# Altium PCB sitara_rev2.PcbDoc
Units mm, origin at the board's own origin, x right, y up, seen from the top; angles counter-clockwise.
Board outline 41.91 x 60.96 mm, 4 copper layers (Top Layer, Internal Plane 1, Internal Plane 2, Bottom Layer), stack 1.61 mm thick; 108 components, 76 nets, 383 pads, 336 vias.
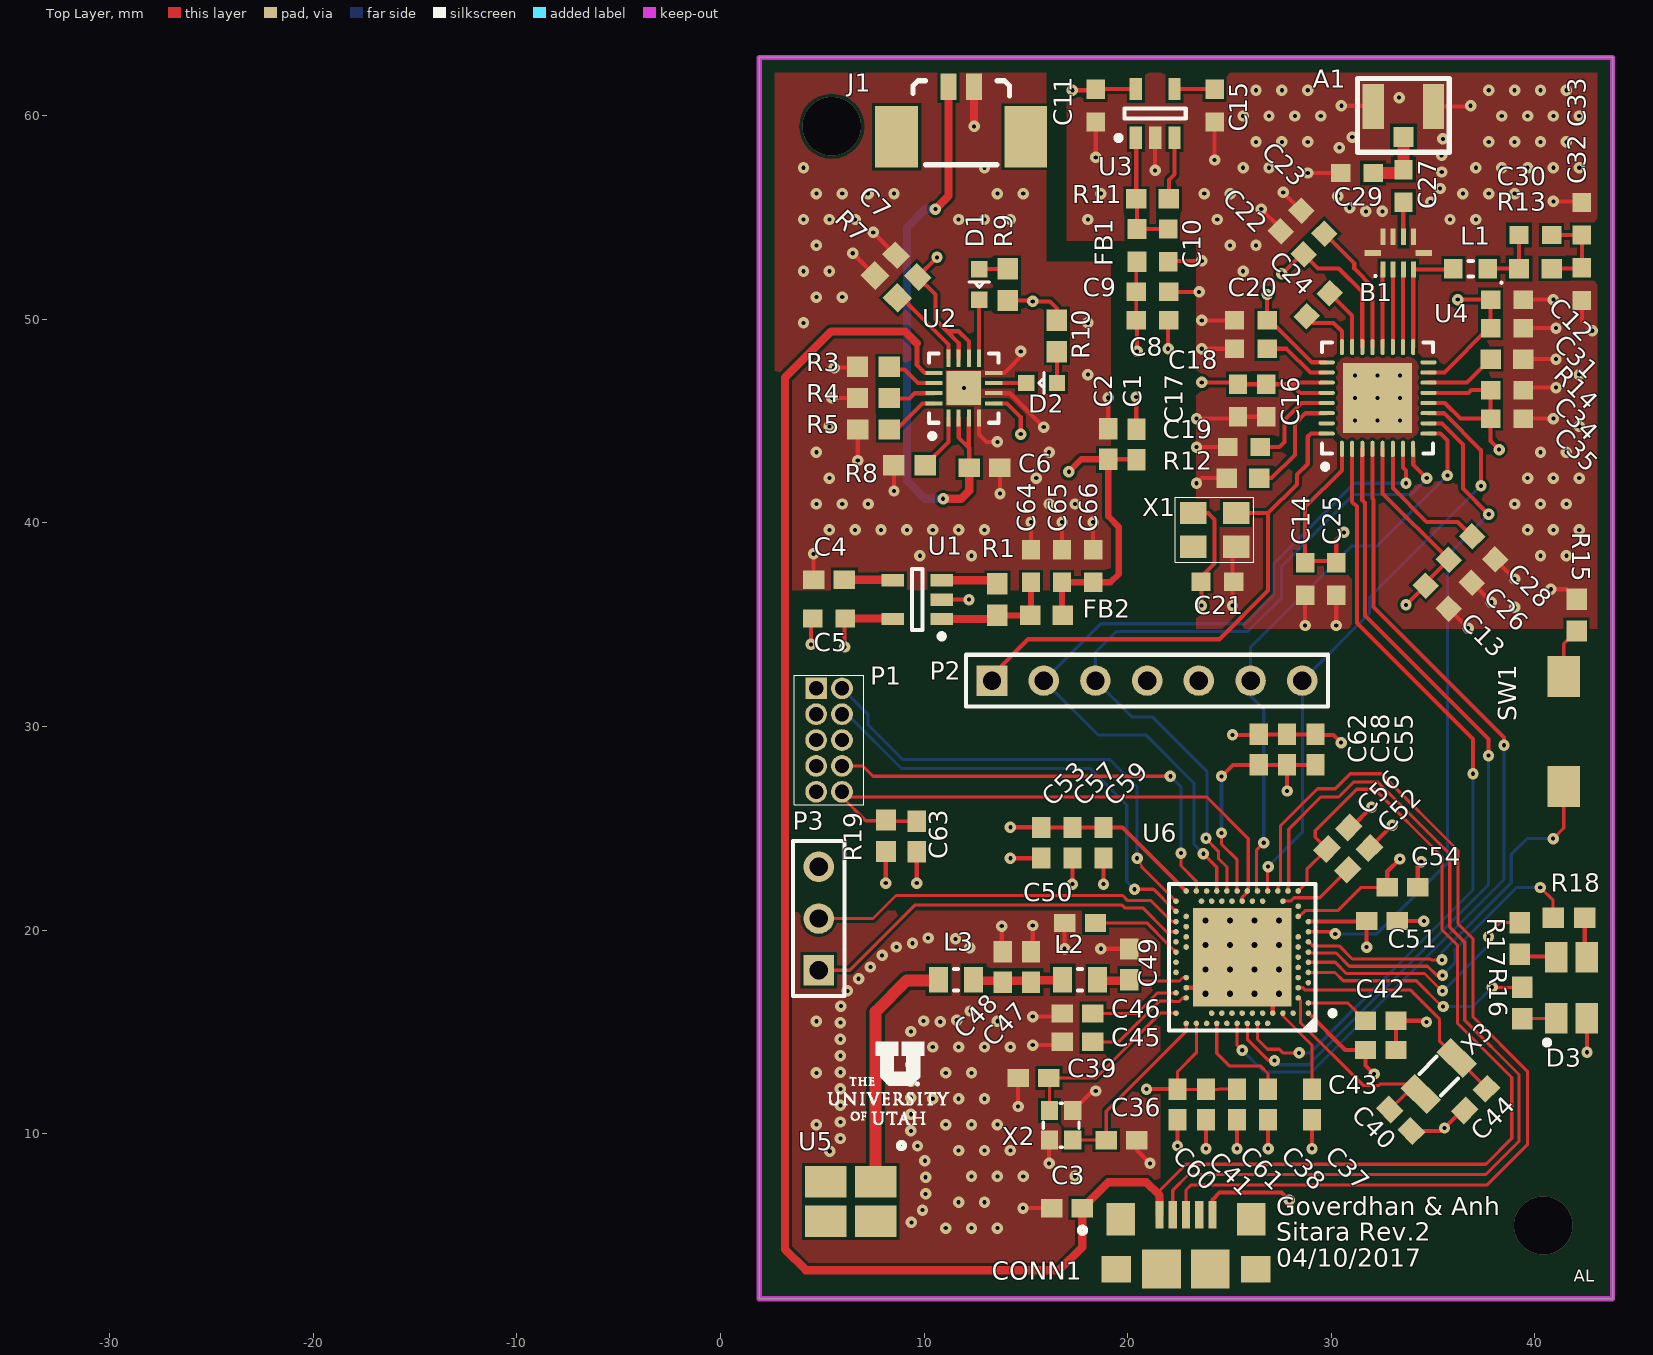
[diagram p0: Top Layer view]
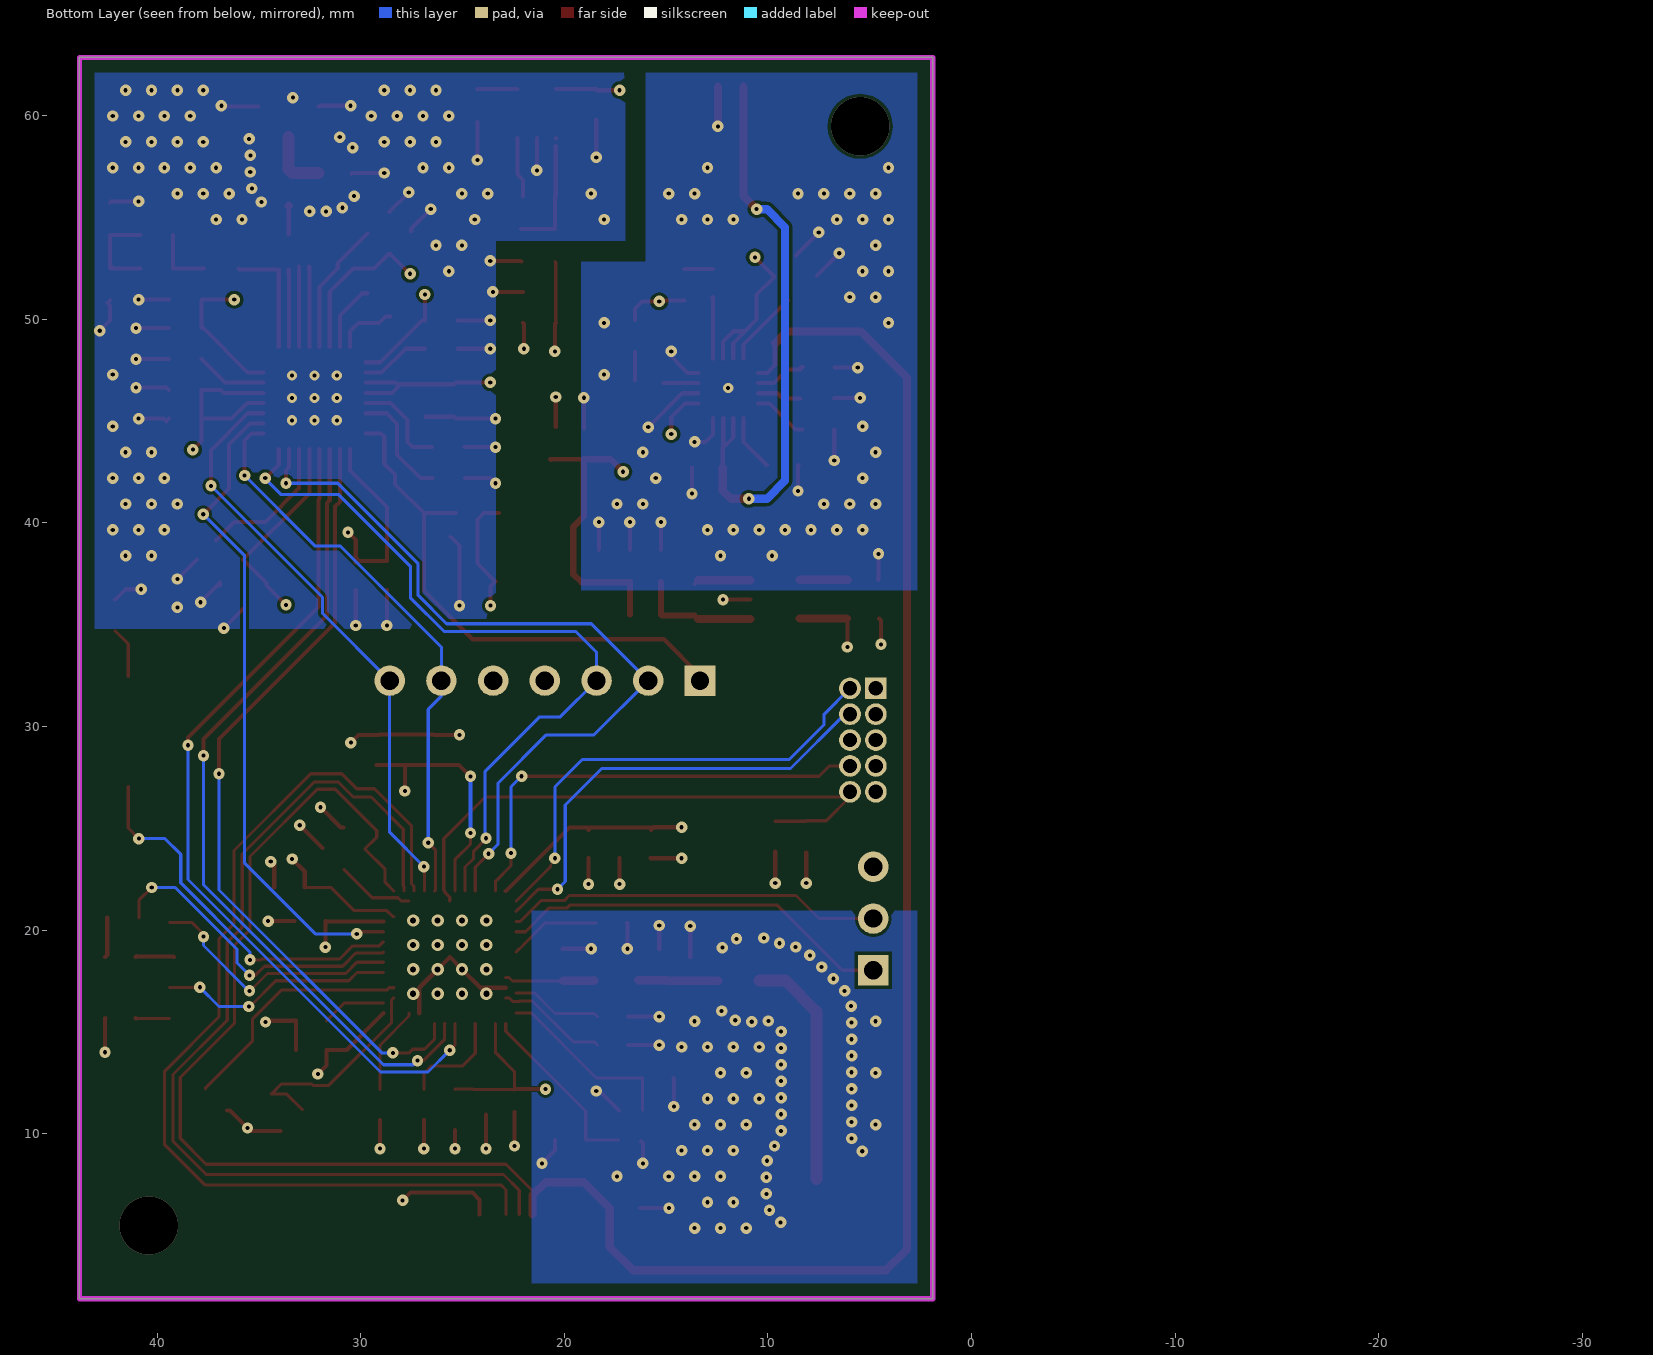
[diagram p1: Bottom Layer view, seen from below]
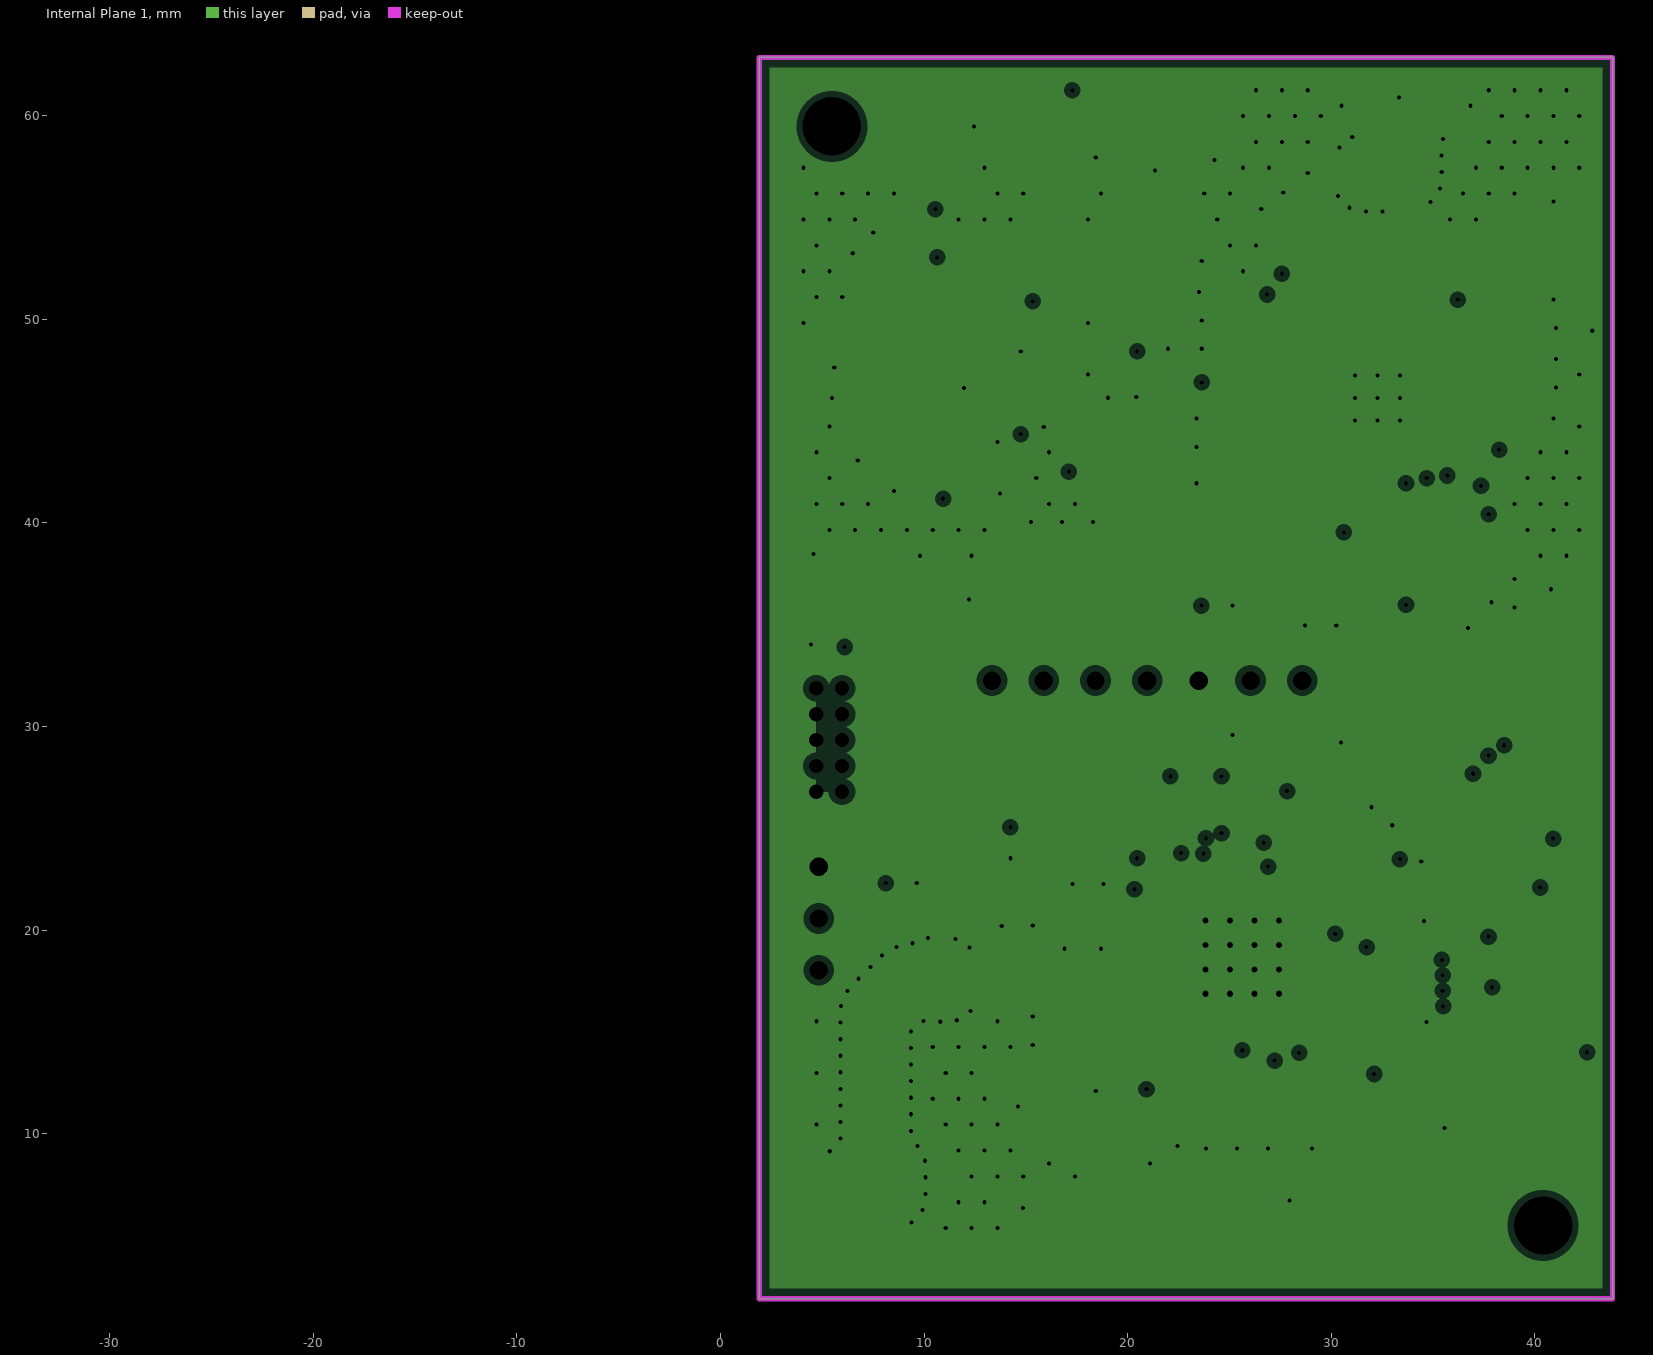
[diagram p2: Internal Plane 1, clearances drawn from the general rule]
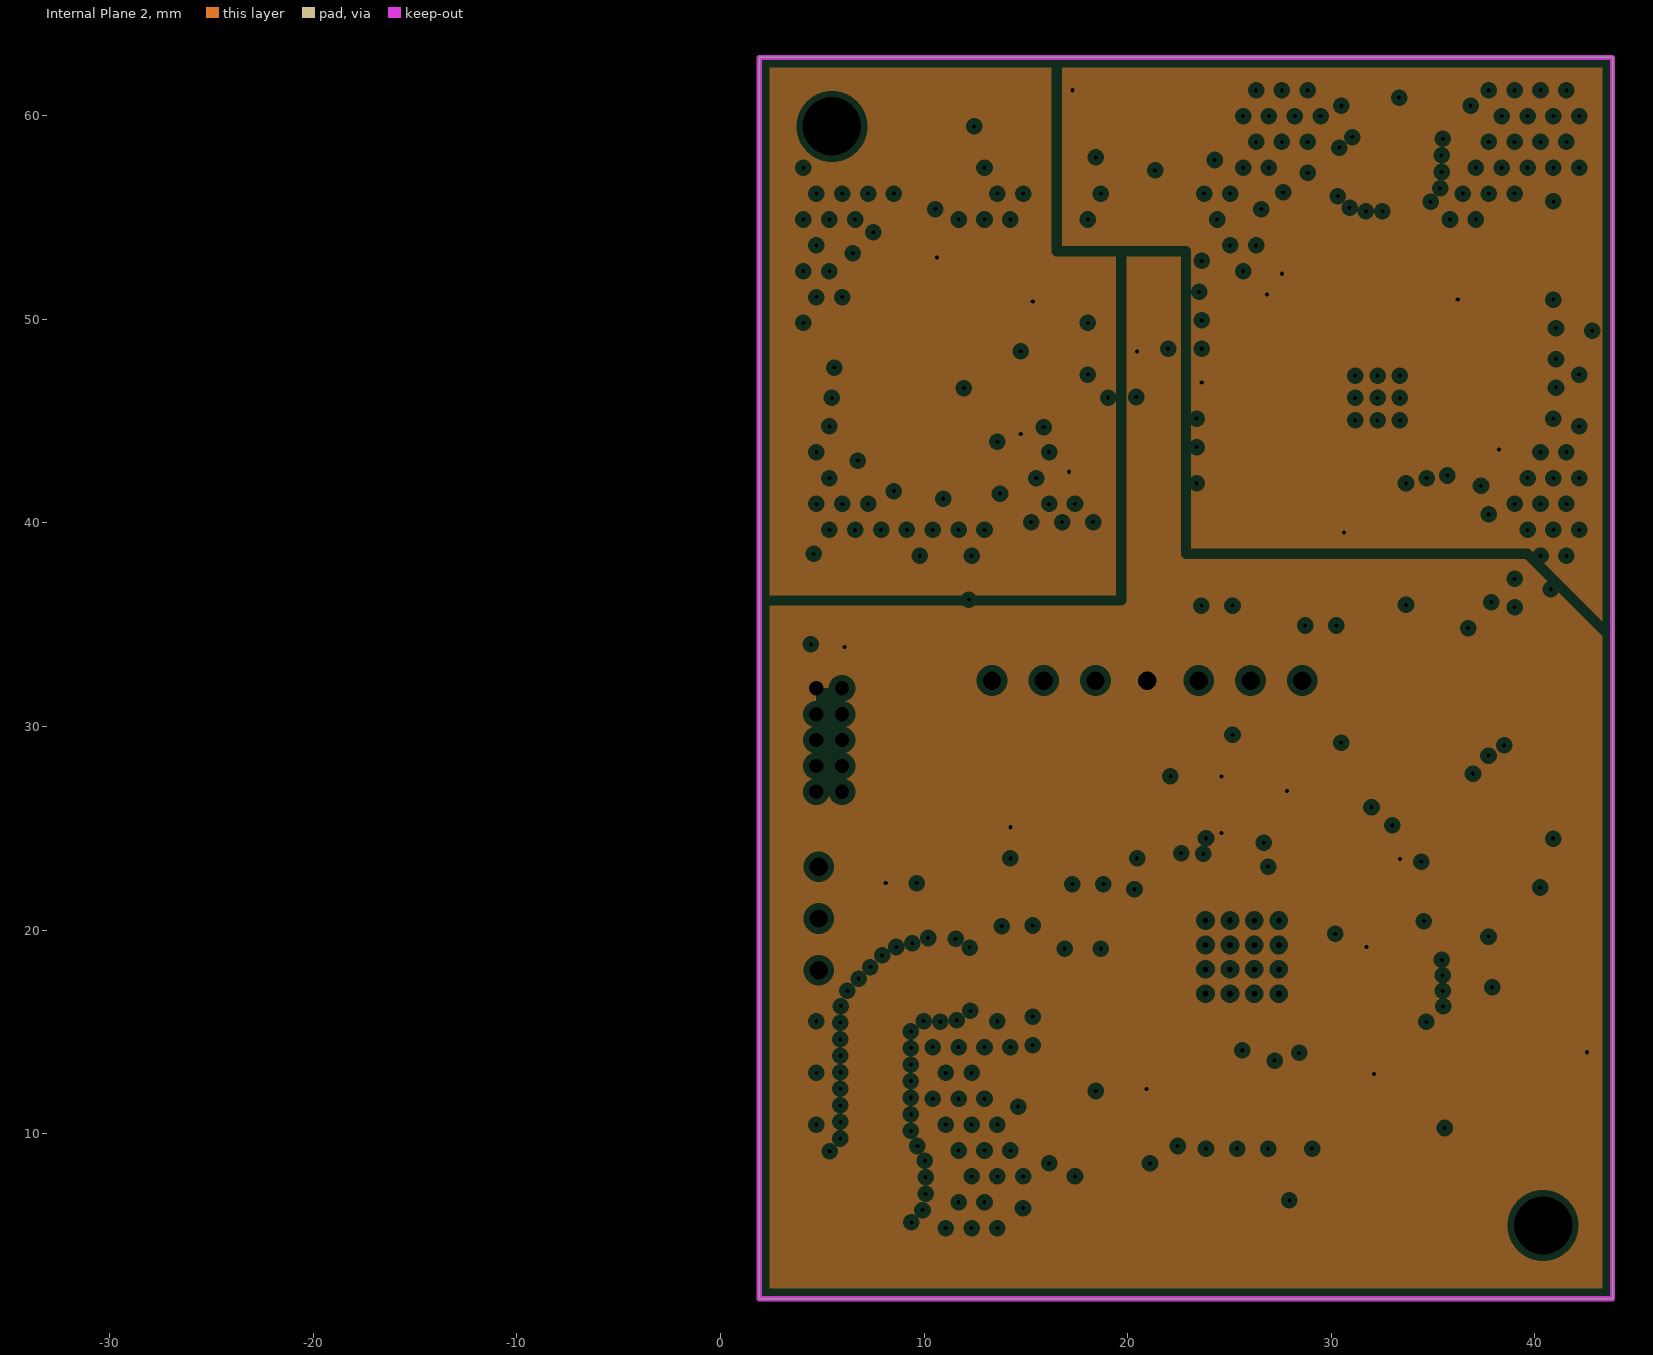
[diagram p3: Internal Plane 2, clearances drawn from the general rule]

## Layer stack, top to bottom
Top Solder: solder mask 0.001, Solder Resist, Dk 3.5
Top Layer: signal copper 0.035
Dielectric1: prepreg 0.38, ML 4, Dk 4.2
Internal Plane 1: plane copper 0.035, net GND
Dielectric2: prepreg 0.71, ML 4, Dk 4.2
Internal Plane 2: plane copper 0.035, net VDD
Dielectric3: prepreg 0.38, ML 4, Dk 4.2
Bottom Layer: signal copper 0.035
Bottom Solder: solder mask 0.001, Solder Resist, Dk 3.5

## Board outline
1.905,1.905 1.905,62.865 43.815,62.865 43.815,1.905

## Design rules (kind name [scope] priority, off if disabled: settings)
Clearance "Clearance~Sunstone Circuits" [All] p1: gap=0.152 ignorepadtopadclearanceinfootprint=FALSE except(0: Arc-Hole Track-Hole SMDPad-Hole THPad-Hole Via-Hole Fill-Hole Poly-Hole Region-Hole Text-Hole) // Sunstone Circuits Minimum Clearance Rule (MLB~4&6 Layer Designs)
Clearance Shielding [InPolygon vs InNetClass('RF')] p2: gap=1.016 ignorepadtopadclearanceinfootprint=FALSE except(0: Arc-Hole Track-Hole SMDPad-Hole THPad-Hole Via-Hole Fill-Hole Poly-Hole Region-Hole Text-Hole)
Clearance [All] p3: gap=0.203 ignorepadtopadclearanceinfootprint=FALSE except(0: Arc-Hole Track-Hole SMDPad-Hole THPad-Hole Via-Hole Fill-Hole Poly-Hole Region-Hole Text-Hole; 0.152: Arc-SMDPad Track-SMDPad SMDPad-SMDPad)
DiffPairsRouting [All] p1: maxlimit=0.254 minlimit=0.254 mostfreqgap=0.254 toplayer_minwidth=0.381 toplayer_maxwidth=0.381 toplayer_prefwidth=0.381 bottomlayer_minwidth=0.381 bottomlayer_maxwidth=0.381 bottomlayer_prefwidth=0.381 maxuncoupledlength=12.7
HoleSize "HoleSize~Sunstone Circuits" [All] p1: absolutevalues=TRUE maxlimit=6.375 minlimit=0.203 maxpercent=80.000 minpercent=20.000 // Sunstone Circuits Hole Size Rule (MLB~4&6 Layer Designs)
HoleSize Testpoint [All] p2: absolutevalues=TRUE maxlimit=2.54 minlimit=0.025 maxpercent=80.000 minpercent=20.000
HoleSize TestPointUsage [All] p3: absolutevalues=TRUE maxlimit=2.54 minlimit=0.025 maxpercent=80.000 minpercent=20.000
HoleSize [All] p4: absolutevalues=TRUE maxlimit=2.54 minlimit=0.025 maxpercent=80.000 minpercent=20.000
MinimumAnnularRing "MinimumAnnularRing~Sunstone Circuits" [All] p1: minimumring=0.178 // Sunstone Circuits Minimum Annular Ring (MLB~4&6 Layer Designs)
PlaneClearance "PlaneClearance~Sunstone Circuits" [All] p1: clearance=0.305 // Sunstone Circuits Power Plane Clearance Rule (MLB~4&6 Layer Designs)
PlaneClearance [All] p2: clearance=0.508
PlaneConnect [All] p1: planeconnectstyle=Direct reliefexpansion=0.508 reliefentries=4 reliefconductorwidth=0.254 reliefairgap=0.254
PlaneConnect "PlaneConnect~Sunstone Circuits" [All] p2: planeconnectstyle=Relief reliefexpansion=0.254 reliefentries=4 reliefconductorwidth=0.203 reliefairgap=0.254 // Sunstone Circuits Power Plane Connect Rule (MLB~4&6 Layer Designs)
PolygonConnect Stitch [IsPolygon vs InNet('GND')] p1: connectstyle=Direct reliefconductorwidth=0.254 reliefentries=4 polygonreliefangle="90 Angle" airgapwidth=0.254
PolygonConnect "PolygonConnect~Sunstone Circuits" [All] p2: connectstyle=Relief reliefconductorwidth=0.203 reliefentries=4 polygonreliefangle="90 Angle" airgapwidth=0.254 // Sunstone Circuits Polygon Connect Style (MLB~4&6 Layer Designs)
PolygonConnect [All] p3: connectstyle=Relief reliefconductorwidth=0.254 reliefentries=4 polygonreliefangle="90 Angle" airgapwidth=0.254
RoutingVias "RoutingVias~Sunstone Circuits" [All] p1: holewidth=0.406 width=0.762 viastyle="Through Hole" minholewidth=0.203 minwidth=0.61 maxholewidth=0.508 maxwidth=1.016 // Sunstone Circuits Routing Vias Rule (MLB~4&6 Layer Designs)
RoutingVias [All] p2: holewidth=0.305 width=0.61 viastyle="Through Hole" minholewidth=0.15 minwidth=0.35 maxholewidth=0.305 maxwidth=0.61
ShortCircuit "ShortCircuit~Sunstone Circuits" [All] p1: allowed=FALSE // Sunstone Circuits Short Circuit Rule~Do Not Allow (MLB~4&6 Layer Designs)
ShortCircuit [All] p2: allowed=FALSE
SolderMaskExpansion "SolderMaskExpansion~Sunstone Circuits" [All] p1: expansion=0.076 // Sunstone Circuits Solder Mask Expansion Rule (MLB~4&6 Layer Designs)
SolderMaskExpansion [All] p2: expansion=0.102
ViasUnderSMD "ViasUnderSMD~Sunstone Circuits" [All] p1: allowed=FALSE // Sunstone Circuits Vias Under SMD~Do Not Allow (MLB~4&6 Layer Designs)
Width Antenna [InNetClass('RF')] p1: maxlimit=0.58 minlimit=0.58 preferedwidth=0.58 impedancedriven=TRUE minimp=50.000000 maximp=50.000000 favimp=50.000000
Width "Width~Sunstone Circuits" [All] p2: maxlimit=2.54 minlimit=0.152 preferedwidth=0.254 // Sunstone Circuits Minimum Width Rule (MLB~4&6 Layer Designs)
Width [All] p3: maxlimit=1.016 minlimit=0.102 preferedwidth=0.406 bottomlayer_minwidth=0.152 minimp=50.000000 maximp=50.000000 favimp=50.000000
25 further rules are at their usual default settings.

## Classes and differential pairs
component class _Block_level_sheet: U5
component class U_BLE_USB_nRF52840: C36 C37 C38 C39 C40 C41 C42 C43 C44 C45 C46 C47 C48 C49 C50 C51 C52 C53 C54 C55 C56 C57 C58 C59 C60 C61 C62 C63 D3 L2 L3 P1 P3 R15 R16 R17 R18 R19 SW1 U6 X2 X3
component class U_Power_System: C1 C2 C3 C4 C5 C6 C7 C64 C65 C66 CONN1 D1 D2 FB2 J1 R1 R3 R4 R5 R7 R8 R9 R10 U1 U2
component class U_RF: A1 B1 C8 C9 C10 C11 C12 C13 C14 C15 C16 C17 C18 C19 C20 C21 C22 C23 C24 C25 C26 C27 C28 C29 C30 C31 C32 C33 C34 C35 FB1 L1 P2 R11 R12 R13 R14 U3 U4 X1
net class RF: ANT NetA1_1
differential pair D1: +D1_P -D1_N

## Components (designator, comment, footprint, x,y, rotation, side; value= is the part's Value field where it differs from the comment)
A1 "U.FL-R-SMT(01)" U.FL-R-SMT-1 33.542,60.452 r0 top
B1 "0900PC15J0013" 0900PC15J0013 33.287,53.251 r90 top
C1 "4.7uF" 0603_Cap 20.432,43.859 r270 top
C2 "0.1uF" 0603_Cap 19.041,43.875 r270 top
C3 "1uF" 0603_Cap 17.018,6.35 r0 top
C4 "10uF" 0603_Cap 5.334,37.211 r0 top
C5 "GRM188R61A105KA61D" "CAPC1608X08N (0603)" 5.334,35.306 r0 top
C6 "4.7uF" 0603_Cap 12.967,42.71 r180 top
C7 "4.7uF" 0603_Cap 9.157,52.616 r315 top
C8 "GRM188R60J106ME47D" "CAPC1608X08N (0603)" 21.222,49.949 r180 top
C9 "GRM188R61A105KA61D" "CAPC1608X08N (0603)" 21.222,51.346 r180 top
C10 "GRM188F51A225ZE01D" "CAPC1608X08N (0603)" 21.984,53.632 r90 top
C11 "GRM188R61A105KA61D" "CAPC1608X08N (0603)" 18.428,60.49 r90 top
C12 "GRM033R60J104KE19D" "CAPC1608X08N (0603)" 38.621,50.965 r180 top
C13 "GRM033R60J104KE19D" "CAPC1608X08N (0603)" 35.192,36.36 r135 top
C14 "GRM188R60J106ME47D" "CAPC1608X08N (0603)" 28.715,37.249 r90 top
C15 "GRM1885C1H102JA01D" "CAPC1608X08N (0603)" 24.27,60.49 r90 top
C16 "GCM188R71H473KA55D" "CAPC1608X08N (0603)" 26.81,46.012 r270 top
C17 "GCM188R71H473KA55D" "CAPC1608X08N (0603)" 25.413,46.012 r270 top
C18 "GCM188R71H473KA55D" "CAPC1608X08N (0603)" 26.048,48.552 r0 top
C19 "GCM188R71H473KA55D" "CAPC1608X08N (0603)" 25.705,43.726 r180 top
C20 "GCM188R71H473KA55D" "CAPC1608X08N (0603)" 26.048,49.949 r0 top
C21 "GRM188R71H103MA01D" "CAPC1608X08N (0603)" 24.402,37.117 r180 top
C22 "GCM188R71H473KA55D" "CAPC1608X08N (0603)" 28.08,53.759 r315 top
C23 "GRM188R71H103MA01D" "CAPC1608X08N (0603)" 29.096,54.775 r135 top
C24 "GRM1885C1H152JA01D" "CAPC1608X08N (0603)" 29.35,50.711 r225 top
C25 "GCM188R71H473KA55D" "CAPC1608X08N (0603)" 30.239,37.249 r90 top
C26 "GCM188R71H473KA55D" "CAPC1608X08N (0603)" 36.335,37.63 r135 top
C27 "C_TBD" "CAPC1608X08N (0603)" 33.541,56.553 r90 top
C28 "GRM188R71E224KA88D" "CAPC1608X08N (0603)" 37.478,38.773 r135 top
C29 "C_TBD" "CAPC1608X08N (0603)" 31.255,57.188 r0 top
C30 "GRM1885C1H330JA01D" "CAPC1608X08N (0603)" 40.018,54.14 r180 top
C31 "GCM188R71H473KA55D" "CAPC1608X08N (0603)" 38.621,49.568 r0 top
C32 "GRM188R71H103MA01D" "CAPC1608X08N (0603)" 42.304,51.727 r90 top
C33 "GQM1885C1H101JB01D" "CAPC1608X08N (0603)" 42.304,54.94 r270 top
C34 "GCM188R71H473KA55D" "CAPC1608X08N (0603)" 38.621,46.52 r0 top
C35 "GCM188R71H473KA55D" "CAPC1608X08N (0603)" 38.621,45.123 r0 top
C36 "12pF" 0603_Cap 19.698,9.69 r0 top
C37 "1uF" 0603_Cap 29.052,11.436 r90 top
C38 "DNP (0.1uF)" 0603_Cap 26.893,11.436 r270 top
C39 "12pF" 0603_Cap 15.38,12.738 r180 top
C40 "12pF" 0603_Cap 33.401,10.668 r135 top
C41 "0.1uF" 0603_Cap 23.845,11.436 r90 top
C42 "0.1uF" 0603_Cap 32.428,15.553 r180 top
C43 "1uF" 0603_Cap 32.428,14.116 r180 top
C44 "12pF" 0603_Cap 37.084,11.684 r45 top
C45 "100pF" 0603_Cap 17.539,14.516 r180 top
C46 "DNP (0.1uF)" 0603_Cap 17.539,15.913 r0 top
C47 "0.5pF" 0603_Cap 15.253,18.199 r270 top
C48 "1.3pF" 0603_Cap 13.856,18.199 r270 top
C49 "0.8pF" 0603_Cap 20.079,18.326 r270 top
C50 "DNP (0.1uF)" 0603_Cap 17.666,20.358 r180 top
C51 "4.7uF" 0603_Cap 32.481,20.453 r180 top
C52 "4.7uF" 0603_Cap 31.338,23.501 r225 top
C53 "0.1uF" 0603_Cap 15.761,24.295 r90 top
C54 "0.1uF" 0603_Cap 33.497,22.104 r180 top
C55 "1uF" 0603_Cap 29.223,28.867 r270 top
C56 "4.7uF" 0603_Cap 30.322,24.517 r225 top
C57 "10uF" 0603_Cap 17.285,24.295 r90 top
C58 "10uF" 0603_Cap 27.826,28.867 r270 top
C59 "1uF" 0603_Cap 18.809,24.295 r90 top
C60 "1uF" 0603_Cap 22.448,11.436 r90 top
C61 "0.1uF" 0603_Cap 25.369,11.436 r90 top
C62 "0.1uF" 0603_Cap 26.429,28.867 r270 top
C63 "0.1uF" 0603_Cap 9.639,24.6 r90 top
C64 "GRM188F51A225ZE01D" "CAPC1608X08N (0603)" 15.253,37.884 r270 top
C65 "GRM188R60J106ME47D" "CAPC1608X08N (0603)" 16.777,37.884 r270 top
C66 "GRM188R61A105KA61D" "CAPC1608X08N (0603)" 18.301,37.884 r270 top
CONN1 "10118193-0001LF" USB_MICRO_B 22.86,4.699 r0 top
D1 "LTST-C191KFKT" 0603_LED 12.713,52.463 r270 top
D2 "LTST-C191KFKT" 0603_LED 16.523,46.875 r180 top
D3 "CLV1A-FKB-CJ1M1F1BB7R4S3" "CREE LV1" 41.796,17.183 r90 top
FB1 "BLM18BD221SN1D" "RESC1608X06N (0603)" 20.46,53.632 r90 top
FB2 "BLM18BD221SN1D" "RESC1608X06N (0603)" 16.015,35.471 r180 top
J1 "0533980271" 53398-0271 11.824,58.966 r0 top
L1 "LQG18HN10NJ00D" INDC1608X08N 36.843,52.489 r180 top
L2 "3.3nH" 0603_IND 17.666,17.564 r180 top
L3 "1.8nH" 0603_IND 11.57,17.564 r180 top
P1 "M50-3500542" M50 5.334,29.337 r270 top
P2 "Header 7" HDR1X7 13.335,32.258 r0 top
P3 "Header 3" HDR1X3 4.826,18.034 r90 top
R1 "10K" 0603_RES 13.602,36.233 r270 top
R3 "56.2K" 0603_RES 7.506,47.663 r0 top
R4 "3.57K" 0603_RES 7.506,46.139 r0 top
R5 "4.32K" 0603_RES 7.519,44.589 r0 top
R7 "2.94K" 0603_RES 8.141,51.6 r135 top
R8 "10K" 0603_RES 9.284,42.837 r0 top
R9 "1.5K" 0603_RES 14.11,51.701 r270 top
R10 "1.5K" 0603_RES 16.523,49.187 r90 top
R11 "RC0603FR-0710KL" "RESC1608X06N (0603)" 21.222,55.918 r180 top
R12 "MCR03ERTJ000" "RESC1608X06N (0603)" 25.667,42.202 r0 top
R13 "RC0603FR-0710RL" "RESC1608X06N (0603)" 40.018,52.489 r180 top
R14 "MCR03ERTJ563" "RESC1608X06N (0603)" 38.621,48.044 r180 top
R15 "3.57K" 0603_RES 42.05,35.471 r270 top
R16 "330" 0603_RES 39.383,16.421 r270 top
R17 "330" 0603_RES 39.256,19.596 r90 top
R18 "330" 0603_RES 41.669,20.612 r180 top
R19 "10K" 0603_RES 8.128,24.638 r90 top
SW1 "EVQ-PE105K" EVQ-PE105K 41.415,29.756 r270 top
U1 "TPS2147IDGQG4" SOT95P280X145-5N 9.665,36.233 r180 top
U2 "BQ24232HARGTT" QFN_16_BQ24232 11.951,46.621 r90 top
U3 "FAN2500S30X" SOT95P280X145-5N 21.349,60.109 r90 top
U4 "CC1200RHBR" S-PVQFN-N32 32.271,46.139 r90 top
U5 "2.4GHz" ANT_molex_2_4_GHz 7.62,7.645 r270 top
U6 "nRF52840-QIAA" AQFN50P700X700X85_HS-74N 25.623,18.675 r180 top
X1 "ASE-40.000MHZ-L-C-T" 3.2x2.5x1.2mmXTAL 24.27,39.662 r0 top
X2 "32MHz" BT-XTAL_2016 16.733,10.42 r270 top
X3 "32.768kHz" XTAL_3215 35.275,12.833 r45 top

## Footprints (in the part's own frame and the unit in brackets; to place one, negate y for a bottom-side part, rotate by r counter-clockwise, add the part's x,y. Pads: shape width x height; smd on the part's side, far side on the other; paste and mask are expansions set on the pad)
3.2x2.5x1.2mmXTAL [mm]
  rect 1.3x1.1 smd: 1(-1.05,-0.825) 2(1.05,-0.825) 3(1.05,0.825) 4(-1.05,0.825)
  round 0.5 on Top Overlay: 5(-2.25,-1.25)
  silkscreen extent -1.92,-1.6 1.92,1.6, body extent -1.6,-1.25 1.6,1.25, height 0.91
0603_Cap [mm] "Chip Capacitor, 2-Leads, Body 1.60x0.80mm, IPC Medium Density"
  rect 1.05x0.9 smd: 1(-0.75,0) 2(0.75,0)
  body extent -0.85,-0.45 0.85,0.45, height 0.9
0603_IND [mm] "Chip Inductor, 2-Leads, Body 1.60x1.05mm, IPC Medium Density"
  rect 0.93x1.25 smd: 1(-0.86,0) 2(0.86,0)
  silkscreen extent -0.1,-0.53 0.1,0.53, body extent -0.9,-0.63 0.9,0.63, height 1.25
0603_LED [mm]
  rect 0.8x0.8 smd: 1(0,0) 2(1.5,0)
  silkscreen extent 0.63,-0.51 0.89,0.51
0603_RES [mm] "Chip Resistor, 2-Leads, Body 1.55x0.80mm, IPC Medium Density"
  rect 1.05x1 smd: 1(-0.775,0) 2(0.775,0)
  body extent -0.85,-0.48 0.85,0.47, height 0.55
0900PC15J0013 [mm]
  rect 0.8x0.25 smd: 1(-0.8,0.75) 2(-0.8,0.25) 3(-0.8,-0.25) 4(-0.8,-0.75) 6(0.8,-0.75) 7(0.8,-0.25) 8(0.8,0.25) 9(0.8,0.75)
  rect 0.3x0.8 smd: 5(0,-1.25) 10(0,1.25)
  silkscreen extent -1.17,1.07 -1.08,1.17, body extent -0.72,-1.1 0.72,1.1, height 1
53398-0271 [mm] "1.25mm Pitch PicoBlade™ Header, Surface Mount, Vertical, Lead-Free, 2 Circuits"
  rect 0.8x1.3 smd: 1(-0.625,2.45) 2(0.625,2.45)
  rect 2.1x3 smd: 3(-3.175,0) 4(3.175,0)
  silkscreen extent -2.37,-1.38 2.37,2.75, body extent -3.83,-1.33 3.82,2.87, height 4.7
ANT_molex_2_4_GHz [mm] "molex antenna footprint"
  rect 1.54x2.04 smd: 1(0,0) 2(1.93,0) 3(1.93,-2.44) 4(0,-2.44)
  silkscreen extent -1.93,1.12 -1.63,1.42
AQFN50P700X700X85_HS-74N [mm]
  rect 4.85x4.85 smd mask+0.05: 74(0,0)
  round 0.275 smd paste+0.012 mask+0.05: A8(-1.25,3.25) A10(-0.75,3.25) A12(-0.25,3.25) A14(0.25,3.25) A16(0.75,3.25) A18(1.25,3.25) A20(1.75,3.25) A22(2.25,3.25) A23(2.75,3.25) AA24(3.25,-2.25) AB2(-2.75,-2.5) AC5(-2,-2.75) AC9(-1,-2.75) AC11(-0.5,-2.75) AC13(0,-2.75) AC15(0.5,-2.75) AC17(1,-2.75) AC19(1.5,-2.75) AC21(2,-2.75) AC24(3.25,-2.75) AD2(-2.75,-3.25) AD4(-2.25,-3.25) AD6(-1.75,-3.25) AD8(-1.25,-3.25) AD10(-0.75,-3.25) AD12(-0.25,-3.25) AD14(0.25,-3.25) AD16(0.75,-3.25) AD18(1.25,-3.25) AD20(1.75,-3.25) AD22(2.25,-3.25) AD23(2.75,-3.25) B1(-3.25,2.75) B3(-2.5,2.75) B5(-2,2.75) B7(-1.5,2.75) B9(-1,2.75) B11(-0.5,2.75) B13(0,2.75) B15(0.5,2.75) B17(1,2.75) B19(1.5,2.75) B24(3.25,2.75) C1(-3.25,2.25) D2(-2.75,2) D23(2.75,2) E24(3.25,1.75) F2(-2.75,1.5) F23(2.75,1.5) G1(-3.25,1.25) H2(-2.75,1) H23(2.75,1) J1(-3.25,0.75) J24(3.25,0.75) K2(-2.75,0.5) L1(-3.25,0.25) L24(3.25,0.25) M2(-2.75,0) N1(-3.25,-0.25) N24(3.25,-0.25) P2(-2.75,-0.5) P23(2.75,-0.5) R1(-3.25,-0.75) R24(3.25,-0.75) T2(-2.75,-1) T23(2.75,-1) U1(-3.25,-1.25) U24(3.25,-1.25) V23(2.75,-1.5) W1(-3.25,-1.75) W24(3.25,-1.75) Y2(-2.75,-2) Y23(2.75,-2)
  silkscreen extent -4.57,-3.6 3.6,3.6, body extent -3.55,-3.55 3.55,3.55, height 0.85
BT-XTAL_2016 [mm]
  rect 0.95x0.85 smd: 1(-0.725,-0.575) 2(0.725,-0.575) 3(0.725,0.575) 4(-0.725,0.575)
  silkscreen extent -1.08,-0.88 1.08,0.88
"CAPC1608X08N (0603)" [mm] "Chip Capacitor, 2-Leads, Body 1.60x0.80mm, IPC Medium Density"
  rect 0.95x0.9 smd: 1(-0.8,0) 2(0.8,0)
  body extent -0.85,-0.45 0.85,0.45, height 0.8
"CREE LV1" [mm]
  rect 1.5x1.1 smd: 1(-1.5,0.75) 2(-1.5,-0.75) 3(1.5,-0.75) 4(1.5,0.75)
  silkscreen extent -2.82,1.07 -2.58,1.32, body extent -1.75,-1.4 1.75,1.4, height 1.9
EVQ-PE105K [mm]
  rect 2x1.6 smd: 1(-2.7,0) 2(2.7,0)
  body extent -3.6,-1.75 3.6,1.75, height 5
HDR1X3 [mm] "Connector; Header; 3 Position"
  rect 1.5x1.5 hole 0.9: 1(0,0)
  round 1.5 hole 0.9: 2(2.54,0) 3(5.08,0)
  silkscreen extent -1.27,-1.27 6.35,1.27
HDR1X7 [mm] "Connector; Header; 7 Position"
  rect 1.5x1.5 hole 0.9: 1(0,0)
  round 1.5 hole 0.9: 2(2.54,0) 3(5.08,0) 4(7.62,0) 5(10.16,0) 6(12.7,0) 7(15.24,0)
  silkscreen extent -1.27,-1.27 16.51,1.27
INDC1608X08N [mm] "Chip Inductor, 2-Leads, Body 1.60x0.80mm, IPC Medium Density"
  rect 0.91x0.96 smd: 1(-0.845,0) 2(0.845,0)
  silkscreen extent -1.56,-0.38 0.1,0.74, body extent -0.87,-0.48 0.87,0.47, height 0.8
M50 [mil]
  rect 42x42 hole 27.56: 1(-100,-25)
  round 42 hole 27.56: 2(-100,25) 3(-50,-25) 4(-50,25) 5(0,-25) 6(0,25) 7(50,-25) 8(50,25) 9(100,-25) 10(100,25)
  silkscreen extent -125,-67 125,67, body extent -125,-67 125,67, height 157
QFN_16_BQ24232 [mm] "QFN, 16-Leads, Body 3.00x3.00mm, Pitch 0.50mm, Thermal Pad 1.68x1.68mm, IPC Medium Density"
  rect 0.85x0.2 smd: 1(-1.465,0.75) 2(-1.465,0.25) 3(-1.465,-0.25) 4(-1.465,-0.75) 9(1.465,-0.75) 10(1.465,-0.25) 11(1.465,0.25) 12(1.465,0.75)
  rect 0.2x0.85 smd: 5(-0.75,-1.465) 6(-0.25,-1.465) 7(0.25,-1.465) 8(0.75,-1.465) 13(0.75,1.465) 14(0.25,1.465) 15(-0.25,1.465) 16(-0.75,1.465)
  rect 1.68x1.68 smd: 17(0,0)
  silkscreen extent -2.47,-1.7 1.7,1.7, body extent -1.55,-1.55 1.55,1.55, height 1
"RESC1608X06N (0603)" [mm] "Chip Resistor, 2-Leads, Body 1.60x0.80mm, IPC Medium Density"
  rect 1x0.95 smd: 1(-0.8,0) 2(0.8,0)
  body extent -0.85,-0.45 0.85,0.45, height 0.55
S-PVQFN-N32 [mm] "QFN, 32-Leads, Body 5.00x5.00mm, Pitch 0.50mm, Thermal Pad 3.45x3.40mm, IPC Medium Density"
  oval 0.8x0.2 smd: 1(-2.5,1.75) 2(-2.5,1.25) 3(-2.5,0.75) 4(-2.5,0.25) 5(-2.5,-0.25) 6(-2.5,-0.75) 7(-2.5,-1.25) 8(-2.5,-1.75) 17(2.5,-1.75) 18(2.5,-1.25) 19(2.5,-0.75) 20(2.5,-0.25) 21(2.5,0.25) 22(2.5,0.75) 23(2.5,1.25) 24(2.5,1.75)
  oval 0.2x0.8 smd: 9(-1.75,-2.5) 10(-1.25,-2.5) 11(-0.75,-2.5) 12(-0.25,-2.5) 13(0.25,-2.5) 14(0.75,-2.5) 15(1.25,-2.5) 16(1.75,-2.5) 25(1.75,2.5) 26(1.25,2.5) 27(0.75,2.5) 28(0.25,2.5) 29(-0.25,2.5) 30(-0.75,2.5) 31(-1.25,2.5) 32(-1.75,2.5)
  rect 3.45x3.4 smd: 33(0,0)
  silkscreen extent -3.5,-2.73 2.73,2.73, body extent -2.58,-2.57 2.57,2.58, height 1
SOT95P280X145-5N [mm] "SOT23, 5-Leads, Body 2.90x2.80mm, Pitch 0.95mm, IPC Medium Density"
  rect 1.1x0.6 smd: 1(-1.2,0.95) 2(-1.2,0) 3(-1.2,-0.95) 4(1.2,-0.95) 5(1.2,0.95)
  silkscreen extent -1.33,-1.5 0.25,1.92, body extent -0.85,-1.5 0.85,1.5, height 1.45
U.FL-R-SMT-1 [mm] "U.FL-R-SMT-1"
  rect 1x1 smd: 1(0,-1.5)
  rect 1.05x2.2 smd: 2(-1.475,0) 3(1.475,0)
  silkscreen extent -2.25,-2.25 2.25,1.38, body extent -1.5,-1.55 1.5,1.55, height 1.26
USB_MICRO_B [mm] "USB_Micro_B_A97800CT-ND"
  rect 1.45x1.3 smd: 0(-3.425,-1.338) 0(3.425,-1.338)
  rect 1.4x1.6 smd: 0(-3.2,1.112) 0(3.2,1.112)
  rect 1.9x1.9 smd: 0(-1.2,-1.338) 0(1.2,-1.338)
  rect 0.4x1.35 smd: 1(-1.3,1.338) 2(-0.65,1.338) 3(0,1.338) 4(0.65,1.338) 5(1.3,1.338)
  silkscreen extent -5.23,0.42 -4.93,0.72, body extent -3.99,-3.93 3.99,1.5, height 2.72
XTAL_3215 [mm]
  rect 1x1.8 smd: 1(-1.25,0) 2(1.25,0)
  silkscreen extent -0.6,-0.75 0.6,0.75, body extent -1.6,-0.75 1.6,0.75, height 0.81

## Part data
A1: "CONN UMC JACK STR 50 OHM SMD"
B1: "TI CC1120 1121 BALUN FILTER IPC"
C1 C6 C7 C51 C52 C56: library part JMK107BJ475MAHT
C2 C38 C41 C42 C46 C50 C53 C54 C61 C62 C63: library part 0603YC104KAT4A, "CAP CER 0.1UF 16V X7R 0603"
C3 C37 C43 C55 C59 C60: library part JMK107C6105KA-T, "CAP CER 1uF SMD"
C4: library part GRM1885C1H102JA01D, "CAP CER 1000PF 50V 5% NP0 0603"
C5 C9 C11 C66: "CAP CER 1UF 10V 10% X5R 0603"
C8 C14 C65: "CAP CER 10UF 6.3V 20% X5R 0603"
C10 C64: "CAP CER 2.2UF 10V Y5V 0603"
C12 C13: "CAP CER 0.1UF 6.3V 10% X5R 0201"
C15: "CAP CER 1000PF 50V 5% NP0 0603"
C16 C17 C18 C19 C20 C22 C25 C26 C31 C34 C35: "CAP CER 0.047UF 50V 10% X7R 0603"
C21 C23 C32: "CAP CER 10000PF 50V 20% X7R 0603"
C24: "CAP CER 1500PF 50V 5% NP0 0603"
C28: "CAP CER 0.22UF 25V 10% X7R 0603"
C30: "CAP CER 33PF 50V NP0 0603"
C33: "CAP CER 100PF 50V 5% NP0 0603"
C36 C39 C40 C44: library part 251R14S120GV4T, "CAP CER 12PF 250V NP0 0603"
C45: library part C1608C0G1H101J080AA, "CAP CER 100PF 50V C0G 0603"
C47: library part 251R14S0R5BV4T, "CAP CER 0.5PF 250V NP0 0603"
C48: library part 251R14S1R3BV4T, "CAP CER 1.3PF 250V NP0 0603"
C49: library part 251R14S0R8BV4T, "CAP CER 0.8PF 250V NP0 0603"
C57 C58: library part EMK107BC6106MA-T, "CAP CER 10uF"
CONN1: "CONN USB MICRO B RECPT SMT R/A"
D1 D2: "LED ORANGE CLEAR 0603 SMD"
D3: "LED RED/GREEN/BLUE PLCC4 SMD"
FB1 FB2: "FERRITE CHIP 220 OHM 200MA 0603"
J1: "CONN HEADER 2POS 1.25MM VERT SMD"
L1: "FIXED IND 10NH 400MA 300 MOHM"
L2: library part LQG18HN3N3S00D, "FIXED IND 3.3NH 500MA 150 MOHM"
L3: library part L-14C1N8SV4T, "FIXED IND 1.8NH 300MA 100 MOHM"
P1: "CONN HDR 1.27MM VERT AU 10POS"
P2: "Header, 7-Pin"
P3: "Header, 3-Pin"
R1: library part RC0603FR-0710KL, "RES 10.0K OHM 1/10W 1% 0603 SMD"
R3: library part ERA-3AEB5622V, "RES SMD 56.2KOHM 0.1% 1/10W 0603"
R4 R15: library part TNPW06033K57BEEA, "RES SMD 3.57KOHM 0.1% 1/10W 0603"
R5: library part ERA-3AEB4321V, "RES SMD 4.32KOHM 0.1% 1/10W 0603"
R7: library part ERA-3AEB2941V, "RES SMD 2.94KOHM 0.1% 1/10W 0603"
R8 R19: library part PHT0603Y1002BGT200, "RES SMD 10KOHM 0.1% 0.0375W 0603"
R9 R10: library part CRCW06031K50JNEA, "RES SMD 1.5K OHM 5% 1/10W 0603"
R11: "RES 10.0K OHM 1/10W 1% 0603 SMD"
R12: "RES 0.0 OHM 1/10W JUMP 0603 SMD"
R13: "RES SMD 10 OHM 1% 1/10W 0603"
R14: "RES 56K OHM 1/10W 5% 0603 SMD"
R16 R17 R18: library part RC0603JR-07330RL, "RES SMD 330 OHM 5% 1/10W 0603"
SW1: "SWITCH TACTILE SPST-NO 0.05A 12V"
U1: library part FAN2500S30X, "IC REG LDO 3V 0.1A SOT23-5"
U2: "IC LI-ION CHARGE PWR MGMT 16VQFN"
U3: "IC REG LDO 3V 0.1A SOT23-5"
U4: "IC RF TXRX SNGL-CHIP LP 32-QFN"
U5: library part 0479480001, "ANTENNA 2.4GHZ 50 OHMS SMD"
U6: library part nRF52840_QIAA, "Multi-protocol Bluetooth Low Energy, IEEE 802.15.4, ANT and 2.4GHz proprietary system-on-chip"
X1: "OSC XO 40.0000MHZ LVCMOS SMD"
X2: "XTAL SMD 2016, 32MHz, Cl=8pF, Total Tol: ±40ppm"
X3: library part XTAL_SMD3215, "XTAL SMD 3215, 32.768kHz, Cl=9pF, Total Tol: ±50ppm"

## Via types
v1: diameter 0.559, hole 0.203, Top Layer to Bottom Layer, tented both sides, 308 vias
v2: diameter 0.61, hole 0.305, Top Layer to Bottom Layer, 16 vias
v3: diameter 0.5, hole 0.2, Top Layer to Bottom Layer, 10 vias
v4: diameter 2.87, hole 2.87, Top Layer to Bottom Layer, 2 vias

## Nets (pads, with @x,y where several pads share a name; then routed paths per layer and width w, separated by ;. In a path a pad name is that pad's centre, name@x,y a point inside that pad or via, vN(x,y) a via of type N, cw(c..) or ccw(c..) an arc to the next point about the centre after c; other vN are vias at no path point)
ANT: L3.2 U5.1 | length 11.6
  Top Layer w0.58: U5.1@7.62,7.779 7.62,16.002 9.15,17.532 L3.2@10.412,17.532
C\S\: P2.7 U4.11 U6.AD8 | length 29.3
  Top Layer w0.152: U6.AD8 26.873,23.1 v1(26.893,23.12)
  Top Layer w0.203: U4.11 35.53,45.389 37.351,43.568 v1(37.351,41.821)
  Bottom Layer w0.152: v1(26.893,23.12) 28.575,24.802 P2.7 31.877,35.56 31.877,36.347 v1(37.351,41.821)
CLK1: P2.1 U4.32 X1.3 | length 26.5
  Top Layer w0.203: P2.1 13.335,32.512 15.113,34.29 24.511,34.29 26.898,36.677 26.898,40.487 ; X1.3 26.898,40.487 ; U4.32 28.997,44.389 28.842,44.234 28.842,42.904 28.308,42.37 28.308,41.897 26.898,40.487
D1_N: CONN1.2 U6.AD4 | length 48.1
  Top Layer w0.152: CONN1.2 22.21,7.224 22.987,8.001 37.587,8.001 39.218,9.632 39.218,12.913 36.551,15.58 36.551,19.415 35.814,20.152 35.814,23.744 32.278,27.28 31.095,27.28 30.358,26.543 29.487,26.543 27.909,24.965 27.909,22.175 27.873,22.139 U6.AD4
D1_P: CONN1.3 U6.AD6 | length 49.3
  Top Layer w0.152: CONN1.3 22.86,7.239 23.114,7.493 37.654,7.493 39.624,9.463 39.624,13.081 36.957,15.748 36.957,19.583 36.22,20.32 36.22,23.912 32.447,27.686 30.926,27.686 30.19,26.949 29.319,26.949 27.502,25.133 27.502,22.268 27.373,22.139 U6.AD6
GND: A1.2 A1.3 B1.5 B1.6 B1.8 B1.9 B1.10 C1.1 C2.1 C3.1 C4.1 C5.1 C6.1 C7.1 C8.1 C9.1 C10.1 C11.1 C12.1 C13.1 C14.1 C15.1 C16.2 C17.2 C18.1 C19.2 C20.1 C21.1 C22.1 C23.2 C25.1 C26.1 C28.1 C29.1 C31.2 C32.1 C33.1 C34.2 C35.2 C36.2 C37.1 C38.2 C39.2 C40.1 C41.1 C42.1 C43.1 C44.1 C45.2 C46.1 C47.1 C48.1 C49.1 C50.2 C51.1 C52.1 C53.1 C54.1 C55.1 C56.1 C57.1 C58.1 C59.1 C60.1 C61.1 C62.1 C63.1 C64.1 C65.1 C66.1 CONN1.5 J1.2 P1.3 P1.5 P1.9 P2.5 P3.3 R3.1 R4.1 R5.1 R7.2 R8.1 R12.1 R14.1 R15.1 U1.2 U2.4 U2.6 U2.8 U2.17 U3.2 U4.33 U6.74 U6.B7 U6.F23 X1.2 X2.2 X2.4 | length 138.1
  Top Layer w0.203: v1(4.445,34.036) 4.445,35.217 C5.1 ; v1(4.572,38.481) 4.572,37.223 C4.1 ; v1(5.474,46.139) 6.718,46.139 R4.1@6.744,46.113 ; v1(5.588,47.625) 6.719,47.625 R3.1@6.731,47.637 ; v1(6.744,43.065) R5.1 ; v1(7.506,54.267) C7.1 ; R7.2 v1(6.496,53.245) ; R8.1 8.522,42.824 v1(8.522,41.567) ; v1(9.639,22.314) C63.1 ; U1.2 v1(12.205,36.233) ; v1@12.449,59.484 v1(12.459,59.474) ; U2.4 12.701,44.347 13.068,43.98 v1(13.602,43.98) ; U2.8 13.945,47.371 14.211,47.637 ; U2.6@13.42,46.367 U2.6 14.208,46.371 v1(15.875,44.704) ; C6.1 13.729,42.698 v1(13.729,41.44) ; C48.1@13.812,18.663 v1(13.812,20.199) ; 14.1,47.525 14.211,47.637 ; v1(14.237,23.533) 15.749,23.533 C53.1 ; v1(14.618,11.341) 14.618,12.726 C39.2 ; v1(14.745,48.425) 14.745,48.171 14.211,47.637 ; v1(14.859,6.35) C3.1 ; C64.1 v1(15.253,40.043) ; v1(15.336,14.357) C45.2@16.872,14.357 ; v1(15.336,15.754) C46.1@16.872,15.754 ; C47.1@15.336,19.044 v1(15.336,20.231) ; v1(16.142,8.547) 16.142,9.545 X2.2@16.225,9.628 ; C65.1 v1(16.777,40.043) ; v1(16.904,19.088) 16.904,20.346 C50.2 ; v1(17.285,22.263) C57.1 ; X2.4 18.266,12.103 v1(18.428,12.103) ; C66.1 v1(18.301,40.043) ; v1(18.428,57.95) C11.1 C11.1@18.428,59.817 ; v1(18.682,19.088) 20.067,19.088 C49.1 ; v1(18.809,22.263) C59.1 ; C2.1 v1(19.041,46.148) ; C1.1@20.423,44.715 v1(20.423,46.185) ; C36.2 20.448,9.194 v1(21.095,8.547) ; v1(21.349,57.315) U3.2 ; v1(21.984,48.552) 21.984,49.784 C8.1@22.022,49.822 ; C9.1 v1(23.508,51.346) ; C10.1@22.111,52.832 22.149,52.87 v1(23.635,52.87) ; v1(22.448,9.404) C60.1 C60.1@22.448,11.067 ; U6.F23 24.123,17.175 v2(25.023,18.075) U6.74 27.123,17.175 U6.B7 ; v1(23.381,41.948) 23.635,42.202 R12.1 ; v1(23.381,43.726) C19.2 ; v1(23.381,45.123) 25.324,45.123 C17.2 C16.2 ; v1(23.635,48.552) C18.1 ; v1(23.635,49.949) C20.1 ; v1(23.845,9.277) C41.1 C41.1@23.845,10.94 ; CONN1.5 24.16,6.761 24.511,7.112 27.559,7.112 v1(27.94,6.731) ; v1(24.27,57.823) C15.1 ; v1(25.146,29.591) 26.403,29.591 C62.1 C58.1 29.083,29.617 29.109,29.591 30.099,29.591 v1(30.48,29.21) ; v1(25.146,35.941) 25.146,38.888 X1.2@25.574,39.316 ; v1(25.369,9.277) C61.1@25.369,10.178 ; v1(26.556,55.41) 27.514,54.452 C22.1 ; v1(26.893,9.277) C38.2 ; v1(27.635,56.236) C23.2@28.599,55.271 ; v1(28.715,34.963) C14.1 C14.1@28.715,36.703 ; v1(28.842,57.188) 30.417,57.188 C29.1@30.455,57.15 ; v1(29.052,9.277) C37.1 ; v1(30.239,34.963) C25.1 C25.1@30.239,36.703 ; v1(30.493,60.49) 32.029,60.49 A1.2 ; C56.1 30.979,25.047 v1(31.973,26.041) ; C52.1 v1(32.989,25.152) ; C43.1 C42.1 34.612,15.553 v1(34.671,15.494) ; C51.1@33.243,20.453 33.249,20.447 v1(34.544,20.447) ; C40.1 35.411,10.138 v1(35.56,10.287) 36.427,11.154 C44.1 ; C54.1 34.247,23.198 v1(34.417,23.368) ; A1.3 36.805,60.452 v1(36.843,60.49) ; C13.1 v1(36.716,34.836) ; C26.1@36.9,36.937 C26.1 v1(37.859,36.106) ; C28.1 v1(39.002,37.249) ; C35.2 39.548,44.996 39.675,45.123 v1(40.907,45.123) ; C34.2 39.548,46.647 v1(41.034,46.647) ; R14.1 v1(41.034,48.044) ; C31.2 v1(41.034,49.568) ; C12.1 v1(40.907,50.965) ; v1(40.78,36.741) 41.555,36.741 R15.1 ; v1(40.907,55.791) 42.253,55.791 C33.1 ; C32.1 42.431,50.8 42.304,50.673 42.304,49.949 v1(42.812,49.441) ; v1(6.496,53.245) 6.623,53.372 v1(6.496,53.245)
  Top Layer w0.406: v1@12.449,59.484 J1.2
  other v1: 11.062,5.372 12.332,5.372 13.602,5.372 9.379,5.649 9.922,6.254 11.697,6.642 12.967,6.642 10.075,7.052 10.075,7.865 12.332,7.912 13.602,7.912 14.872,7.912 17.412,7.912 10.04,8.677 5.369,9.147 11.697,9.182 12.967,9.182 14.237,9.182 9.675,9.403 5.89,9.771 9.35,10.148 4.712,10.452 11.062,10.452 12.332,10.452 13.602,10.452 5.89,10.584 9.35,10.961 5.89,11.397 10.427,11.722 11.697,11.722 12.967,11.722 9.35,11.774 5.89,12.21 9.35,12.587 4.712,12.992 11.062,12.992 12.332,12.992 5.89,13.022 9.35,13.4 5.89,13.835 9.35,14.212 10.427,14.262 11.697,14.262 12.967,14.262 14.237,14.262 5.89,14.648 9.35,15.025 5.89,15.461 10.792,15.504 4.712,15.532 9.98,15.539 13.602,15.532 11.602,15.576 12.273,16.034 5.917,16.273 6.231,17.023 6.787,17.616 7.361,18.19 7.937,18.764 12.235,19.144 8.638,19.176 9.43,19.357 11.546,19.575 10.2,19.618 39.002,35.852 9.792,38.392 12.332,38.392 40.272,38.392 41.542,38.392 5.347,39.662 6.617,39.662 7.887,39.662 9.157,39.662 10.427,39.662 11.697,39.662 12.967,39.662 39.637,39.662 40.907,39.662 42.177,39.662 4.712,40.932 5.982,40.932 7.252,40.932 16.142,40.932 17.412,40.932 39.002,40.932 40.272,40.932 41.542,40.932 5.347,42.202 15.507,42.202 39.637,42.202 40.907,42.202 42.177,42.202 4.712,43.472 16.142,43.472 40.272,43.472 41.542,43.472 5.347,44.742 42.177,44.742 18.047,47.282 42.177,47.282 4.077,49.822 18.047,49.822 4.712,51.092 5.982,51.092 4.077,52.362 5.347,52.362 25.667,52.362 4.712,53.632 25.032,53.632 26.302,53.632 4.077,54.902 5.347,54.902 6.617,54.902 11.697,54.902 12.967,54.902 14.237,54.902 18.047,54.902 24.397,54.902 35.827,54.902 37.097,54.902 31.694,55.303 32.507,55.303 30.9,55.48 34.874,55.763 30.324,56.053 4.712,56.172 5.982,56.172 7.252,56.172 8.522,56.172 13.602,56.172 14.872,56.172 18.682,56.172 23.762,56.172 25.032,56.172 36.462,56.172 37.732,56.172 39.002,56.172 35.343,56.427 35.425,57.236 4.077,57.442 12.967,57.442 25.667,57.442 26.937,57.442 37.097,57.442 38.367,57.442 39.637,57.442 40.907,57.442 42.177,57.442 35.414,58.048 30.396,58.432 26.302,58.712 27.572,58.712 28.842,58.712 37.732,58.712 39.002,58.712 40.272,58.712 41.542,58.712 35.476,58.859 31.025,58.948 25.667,59.982 26.937,59.982 28.207,59.982 29.477,59.982 38.367,59.982 39.637,59.982 40.907,59.982 42.177,59.982 33.326,60.887 26.302,61.252 27.572,61.252 28.842,61.252 37.732,61.252 39.002,61.252 40.272,61.252 41.542,61.252
  other v2: 23.823,16.875 25.023,16.875 26.223,16.875 27.423,16.875 23.823,18.075 26.223,18.075 27.423,18.075 23.823,19.275 25.023,19.275 26.223,19.275 27.423,19.275 23.823,20.475 25.023,20.475 26.223,20.475 27.423,20.475
  other v3: 31.171,45.039 32.271,45.039 33.371,45.039 31.171,46.139 32.271,46.139 33.371,46.139 11.951,46.621 31.171,47.239 32.271,47.239 33.371,47.239
GPIO0: U4.10 U6.U1 | length 32.4
  Top Layer w0.152: U6.U1 30.088,19.925 v1(30.195,19.818)
  Top Layer w0.203: U4.10 35.426,44.889 36.462,43.853 36.462,41.694 v1(37.732,40.424)
  Bottom Layer w0.152: v1(30.195,19.818) 32.227,19.818 35.7,23.291 35.7,38.392 v1(37.732,40.424)
IO_2: U4.4 U6.A14 | length 42.5
  Top Layer w0.152: U6.A14 25.373,14.353 v1(25.623,14.103)
  Top Layer w0.203: U4.4 32.021,41.189 32.067,41.142 32.067,35.877 38.481,29.464 v1(38.481,29.083)
  Bottom Layer w0.152: v1(25.623,14.103) 26.689,13.036 29.028,13.036 38.481,22.489 v1(38.481,29.083)
IO_3: U4.3 U6.A12 | length 40.8
  Top Layer w0.152: U6.A12 25.877,15.421 25.877,14.639 26.921,13.595 v1(27.21,13.595)
  Top Layer w0.203: U4.3 31.521,41.114 31.661,40.973 31.661,35.446 37.719,29.388 v1(37.719,28.575)
  Bottom Layer w0.152: v1(27.21,13.595) 27.413,13.392 28.881,13.392 37.719,22.23 v1(37.719,28.575)
LED_B: R18.2 U6.N1 | length 15.8
  Top Layer w0.152: U6.N1 28.92,18.878 30.235,18.878 30.882,18.231 34.723,18.231 35.174,17.78 v1(35.461,17.78) ; v1(40.259,22.098) 40.894,21.463 R18.2
  Bottom Layer w0.152: v1(35.461,17.78) 36.068,18.387 36.068,19.055 39.111,22.098 v1(40.259,22.098)
LED_G: R17.2 U6.L1 | length 12.8
  Top Layer w0.152: U6.L1 30.186,18.425 30.735,17.876 34.575,17.876 35.433,17.018 v1(35.461,17.018) ; v1(37.719,19.685) 37.719,19.812 38.278,20.371 R17.2 R17.2@39.383,20.371
  Bottom Layer w0.152: v1(35.461,17.018) 35.49,17.018 37.719,19.247 v1(37.719,19.685)
LED_R: R16.1 U6.J1 | length 11.6
  Top Layer w0.152: U6.J1 30.183,17.925 30.588,17.52 34.169,17.52 35.433,16.256 v1(35.49,16.256) v1@35.49,16.199 ; v1(37.897,17.196) R16.1
  Bottom Layer w0.152: v1(35.49,16.256) 36.957,16.256 v1(37.897,17.196)
MISO: P2.6 U4.9 U6.AD10 | length 28.3
  Top Layer w0.152: U6.AD10 26.334,21.964 26.334,23.946 v1(26.683,24.295)
  Top Layer w0.203: U4.9 35.351,44.389 35.7,44.04 v1(35.7,42.329)
  Bottom Layer w0.152: v1(26.683,24.295) 26.683,30.848 26.035,31.496 P2.6 26.035,33.909 30.988,38.862 32.233,38.862 v1(35.7,42.329)
MOSI: P2.2 U4.7 U6.AD18 | length 39.9
  Top Layer w0.152: v1(23.718,23.755) 24.373,23.1 U6.AD18
  Top Layer w0.203: U4.7 33.521,42.73 33.668,42.583 v1(33.668,41.948)
  Bottom Layer w0.152: v1@23.873,23.628 23.746,23.755 v1(23.718,23.755) 23.254,24.219 23.254,27.216 20.879,29.591 18.542,29.591 P2.2 18.669,35.052 25.781,35.052 27.178,36.449 27.178,37.993 31.133,41.948 v1(33.668,41.948)
NetA1_1: A1.1 C27.2 C29.2 | length 3.2
  Top Layer w0.417: A1.1 A1.1
  Top Layer w0.58: C29.2 33.376,57.188 C27.2 A1.1
NetB1_1: B1.1 U4.20 | length 4.2
  Top Layer w0.203: U4.20 32.521,52.578 B1.1@32.521,52.451 ; B1.1@32.536,52.451 B1.1@32.537,52.578
NetB1_2: B1.2 U4.19 | length 3.8
  Top Layer w0.203: U4.19 33.021,52.435 B1.2 ; B1.2@33.021,52.562 B1.2@33.021,52.578
NetB1_3: B1.3 U4.18 | length 4
  Top Layer w0.203: U4.18 33.521,52.435 B1.3 B1.3@33.537,52.239
NetB1_4: B1.4 L1.2 U4.17 | length 5.8
  Top Layer w0.203: U4.17 34.021,52.435 B1.4 35.96,52.451 L1.2
NetB1_7: B1.7 C27.1 | length 1.4
  Top Layer w0.229: B1.7@33.537,54.178 33.537,55.584 C27.1@33.537,55.622
  Top Layer w0.417: C27.1@33.537,55.584 C27.1@33.541,55.588
NetC4_2: C4.2 U1.4 | length 2.4
  Top Layer w0.152: U1.4@8.437,37.211 U1.4
  Top Layer w0.406: C4.2 U1.4@8.437,37.211
NetC6_2: C6.2 J1.1 U2.2 U2.3 | length 29.1
  Top Layer w0.203: U2.2 11.701,44.194 12.195,43.7 ; U2.3@12.195,45.15 12.195,43.7 ; C6.2@12.217,42.938 12.217,43.678 12.195,43.7
  Top Layer w0.406: v1(10.554,55.41) 11.199,56.055 J1.1 ; v1(10.935,41.186) 11.824,41.186 12.217,41.579 C6.2
  Bottom Layer w0.406: v1(10.554,55.41) 10.046,55.41 9.157,54.521 9.157,42.075 10.046,41.186 v1(10.935,41.186)
NetC10_2: C10.2 FB1.2 R11.2 U3.1 | length 5.8
  Top Layer w0.203: U3.1 U3.1@20.422,58.886 ; U3.1@20.422,58.505 20.422,56.045 20.46,56.007 20.46,55.537 FB1.2 C10.2 C10.2@22.111,54.432
NetC15_2: C15.2 U3.4 | length 2
  Top Layer w0.203: U3.4 24.251,61.309 C15.2
NetC18_2: C18.2 U4.26 | length 3.4
  Top Layer w0.203: C18.2 27.806,48.552 28.969,47.389 U4.26
NetC19_1: C19.1 U4.29 | length 4.8
  Top Layer w0.203: C19.1 27.445,43.726 27.699,43.98 27.699,45.056 28.531,45.889 U4.29
NetC23_1: C23.1 U4.21 | length 6.5
  Top Layer w0.203: C23.1 31.128,52.743 31.128,52.489 32.021,51.596 U4.21
NetC24_1: C24.1 U4.23 | length 3.4
  Top Layer w0.203: C24.1@29.661,51.277 29.927,51.277 31.021,50.183 U4.23
NetC24_2: C24.2 U4.24 | length 3.1
  Top Layer w0.203: C24.2@28.53,50.145 C24.2 29.107,49.822 30.112,49.822 30.521,49.413 U4.24
NetC28_2: C28.2 U4.6 | length 7.1
  Top Layer w0.203: U4.6 33.021,41.706 34.684,40.043 36.208,40.043 C28.2@37.103,39.148
NetC30_1: C30.1 C32.2 C33.2 R13.1 | length 4.5
  Top Layer w0.203: R13.1 42.266,52.489 C32.2 ; C30.1 C33.2 42.304,52.654 C32.2@42.266,52.616
NetC30_2: C30.2 L1.1 R13.2 | length 3.2
  Top Layer w0.203: L1.1 R13.2 C30.2
NetC36_1: C36.1 U6.A23 X2.3 | length 9
  Top Layer w0.152: X2.3 18.943,9.695 C36.1 18.948,11.111 22.873,15.036 U6.A23
NetC37_2: C37.2 U6.B5 | length 4.3
  Top Layer w0.152: U6.B5 27.623,15.786 29.052,14.357 C37.2
NetC38_1: C38.1 U6.A18 | length 5.2
  Top Layer w0.152: U6.A18 24.373,13.956 24.988,13.341 26.512,13.341 26.893,12.96 C38.1
NetC39_1: C39.1 U6.B24 X2.1 | length 9.2
  Top Layer w0.152: X2.1 16.158,12.71 C39.1 18.416,12.738 21.603,15.925 U6.B24
NetC40_2: C40.2 U6.D2 X3.1 | length 10.5
  Top Layer w0.152: U6.D2 28.489,16.559 28.489,15.453 31.562,12.38 32.331,12.38 32.397,12.446 33.894,12.446 X3.1 33.622,11.949 C40.2
NetC42_2: C42.2 U6.C1 | length 3.2
  Top Layer w0.152: U6.C1 30.806,16.425 C42.2
NetC44_2: C44.2 U6.F2 X3.2 | length 12
  Top Layer w0.152: U6.F2 28.605,17.175 28.721,17.059 33.896,17.059 35.23,15.725 35.306,15.649 35.306,14.57 X3.2 37.614,12.261 C44.2
NetC45_1: C45.1 U6.D23 | length 5.5
  Top Layer w0.152: C45.1@18.372,14.357 18.531,14.516 19.559,14.516 21.559,16.516 22.192,16.516 22.2,16.508 22.545,16.508 22.712,16.675 U6.D23
NetC46_2: C46.2 U6.E24 | length 4.5
  Top Layer w0.152: C46.2@18.372,15.754 18.531,15.913 20.453,15.913 21.465,16.925 U6.E24
NetC49_2: C49.2 L2.1 U6.H23 | length 4.4
  Top Layer w0.152: C49.2@20.079,17.52 20.091,17.508 22.545,17.508 22.712,17.675 U6.H23
  Top Layer w0.417: L2.1@18.526,17.532 18.538,17.52 C49.2@20.079,17.52
NetC50_1: C50.1 U6.N24 | length 4.6
  Top Layer w0.152: C50.1 20.94,20.358 22.007,19.291 22.007,19.273 22.221,19.059 22.239,19.059 U6.N24
NetC52_2: C52.2 U6.AC5 | length 3.8
  Top Layer w0.152: U6.AC5 27.992,21.425 28.163,21.596 29.433,21.596 C52.2
NetC64_2: C64.2 FB2.2 R1.2 U1.1 | length 6.1
  Top Layer w0.152: R1.2@13.427,35.283 R1.2 ; FB2.2@15.202,35.458 FB2.2 FB2.2@15.253,35.509
  Top Layer w0.305: R1.2 FB2.2@15.202,35.458 ; FB2.2@15.253,35.509 C64.2
  Top Layer w0.406: U1.1 R1.2@13.427,35.283
NetD1_1: D1.1 R9.1 | length 1.4
  Top Layer w0.203: D1.1 14.097,52.463 R9.1
NetD1_2: D1.2 U2.9 | length 3
  Top Layer w0.203: U2.9 12.701,50.951 D1.2 D1.2@12.713,51.09
NetD2_1: D2.1 R10.1 | length 1.4
  Top Layer w0.203: D2.1@16.523,47.002 R10.1@16.523,48.386
NetD2_2: D2.2 U2.7 | length 1.7
  Top Layer w0.203: U2.7 15.023,46.871 D2.2@15.126,46.871
NetD3_1: D3.1 R16.2 | length 1.7
  Top Layer w0.152: R16.2@39.396,15.659 41.022,15.659 D3.1@41.035,15.672
  Top Layer w0.203: D3.1@41.035,15.672 D3.1
NetD3_3: D3.3 R18.1 | length 2
  Top Layer w0.203: R18.1 42.444,18.785 D3.3
NetD3_4: D3.4 R17.1 | length 1.9
  Top Layer w0.203: R17.1@39.166,18.683 39.19,18.707 40.996,18.707 41.009,18.72 D3.4
NetR1_1: R1.1 U1.3 | length 2.8
  Top Layer w0.203: R1.1@13.427,37.183 R1.1
  Top Layer w0.406: U1.3 R1.1@13.427,37.183
NetR3_2: R3.2 U2.14 | length 2.6
  Top Layer w0.203: R3.2@8.369,47.663 R3.2 8.408,47.536 9.03,47.536 9.695,46.871 U2.14
NetR4_2: R4.2 U2.15 | length 2.2
  Top Layer w0.203: R4.2@8.408,46.113 9.284,46.113 9.542,46.371 U2.15
NetR5_2: R5.2 U2.16 | length 2.6
  Top Layer w0.203: R5.2 R5.2@8.522,44.589 ; R5.2@8.649,44.589 9.931,45.871 U2.16
NetR7_1: R7.1 U2.12 | length 3.7
  Top Layer w0.203: R7.1@9.03,50.926 9.043,50.926 11.201,48.768 U2.12
NetR8_2: R8.2 U2.1 | length 2.8
  Top Layer w0.203: R8.2 11.201,43.979 U2.1
NetR11_1: R11.1 U3.3 | length 3
  Top Layer w0.203: R11.1@22.022,56.045 22.022,56.845 22.299,57.122 U3.3
NetR12_2: R12.2 U4.30 | length 5.5
  Top Layer w0.203: R12.2 27.064,42.202 28.207,43.345 28.207,44.869 28.727,45.389 U4.30
NetR14_2: R14.2 U4.14 | length 3.5
  Top Layer w0.203: U4.14 36.666,46.889 R14.2
NetR15_2: R15.2 SW1.1 | length 2.5
  Top Layer w0.152: SW1.1 41.415,34.061 R15.2
NetSW1_2: SW1.2 U6.R1 | length 18.7
  Top Layer w0.152: U6.R1 28.89,19.425 29.082,19.234 30.383,19.234 31.03,18.587 34.87,18.587 34.915,18.542 v1(35.433,18.542) ; v1(40.894,24.498) 41.415,25.019 SW1.2
  Bottom Layer w0.152: v1(35.433,18.542) 35.433,18.923 38.837,22.327 38.837,23.724 39.611,24.498 v1(40.894,24.498)
R\S\T\: U4.2 U6.A10 | length 39.1
  Top Layer w0.152: U6.A10 26.373,14.646 26.865,14.154 27.442,14.154 27.619,13.976 v1(28.417,13.976)
  Top Layer w0.203: U4.2 31.021,41.039 31.255,40.805 31.255,35.09 36.957,29.388 v1(36.957,27.686)
  Bottom Layer w0.152: v1(28.417,13.976) 28.962,13.976 36.957,21.971 v1(36.957,27.686)
RESET: C63.2 P1.10 R19.2 U6.AC13 U6.AD12 | length 28.5
  Top Layer w0.152: C63.2 8.14,25.35 8.115,25.375 7.137,25.375 5.969,26.543 P1.10 5.975,26.803 6.235,26.543 23.876,26.543 25.921,24.498 25.921,21.973 U6.AD12 25.873,21.871 25.623,21.621 U6.AC13
RF: C47.2 C48.2 L2.2 L3.1 | length 4
  Top Layer w0.417: L3.1@12.43,17.52 14.955,17.52 14.967,17.532 L2.2@16.381,17.532
SCLK: P2.3 U4.8 U6.AD16 | length 37.6
  Top Layer w0.152: v1(23.845,24.517) 23.845,24.489 24.454,23.879 24.454,23.521 24.873,23.103 U6.AD16
  Top Layer w0.203: U4.8 34.021,42.865 v1(34.684,42.202)
  Bottom Layer w0.152: v1(23.845,24.517) 23.889,24.473 23.889,27.8 21.209,30.48 20.193,30.48 P2.3 18.415,33.655 19.431,34.671 25.903,34.671 27.559,36.327 27.559,37.871 31.077,41.389 33.899,41.389 34.684,42.174 v1(34.684,42.202)
SWDCLK: P1.4 U6.AA24 | length 22.3
  Top Layer w0.152: v1(20.333,22.009) 21.271,22.009 22.221,21.059 22.239,21.059 U6.AA24
  Bottom Layer w0.152: P1.4 6.223,30.607 8.89,27.94 18.161,27.94 19.952,26.149 19.952,22.39 20.111,22.231
SWDIO: P1.2 U6.AC24 | length 23.2
  Top Layer w0.102: v1(20.46,23.533) 20.694,23.152 20.67,23.128
  Top Layer w0.152: 20.67,23.128 U6.AC24
  Bottom Layer w0.152: P1.2 7.239,30.607 7.239,30.099 8.954,28.384 19.114,28.384 20.46,27.038 v1(20.46,23.533)
SWO: P1.8 U6.AD22 | length 22.5
  Top Layer w0.152: P1.8 6.985,28.067 7.493,27.559 v1(22.098,27.559) ; v1(22.619,23.787) 22.619,23.162 23.373,22.408 U6.AD22
  Bottom Layer w0.152: v1(22.098,27.559) 22.619,27.038 v1(22.619,23.787)
UART_RX: P3.2 U6.W24 | length 18.5
  Top Layer w0.152: P3.2 7.493,20.574 8.623,21.704 19.748,21.704 20.002,21.45 21.145,21.45 22.171,20.425 U6.W24
UART_TX: P3.1 U6.U24 | length 19.4
  Top Layer w0.152: P3.1 6.35,18.034 9.563,21.247 19.703,21.247 19.855,21.095 20.739,21.095 21.909,19.925 U6.U24
VBUS: C3.2 C56.2 CONN1.1 U2.13 U6.AD2 | length 121.3
  Top Layer w0.152: 21.56,7.209 22.86,8.509 37.592,8.509 38.862,9.779 38.862,12.765 36.195,15.432 36.195,19.268 35.433,20.03 35.433,23.622 32.131,26.924 31.242,26.924 29.21,24.892 29.21,24.568 C56.2 28.798,22.993 28.798,22.35 U6.AD2
  Top Layer w0.203: 9.652,47.752 10.033,47.371 U2.13
  Top Layer w0.254: 9.652,47.752 9.652,48.819
  Top Layer w0.406: 9.652,48.819 9.068,49.403 5.436,49.403 3.175,47.142 3.175,4.318 4.191,3.302 16.637,3.302 17.768,4.433 C3.2 19.038,7.62 20.925,7.62 21.56,6.985 CONN1.1
VCC: C1.2 C2.2 C7.2 C65.2 C66.2 FB2.1 R9.2 R10.2 U2.5 U2.10 U2.11 | length 28.2
  Top Layer w0.203: v1(10.637,53.041) 9.687,52.091 C7.2 10.554,51.219 10.554,49.99 11.128,49.415 ; U2.11 11.701,48.843 11.128,49.415 ; U2.10 12.201,48.903 11.689,49.415 11.128,49.415 ; U2.5 14.073,45.871 14.745,45.199 v1(14.745,44.361) ; R9.2 15.292,50.926 v1(15.336,50.882) 16.174,50.882 16.523,50.533 R10.2 ; FB2.1@16.777,35.509 FB2.1 ; C2.2 C1.2@20.627,43.125 ; C1.2@20.66,43.093 C1.2@20.627,43.125 ; C1.2@20.692,43.125 C1.2@20.627,43.125
  Top Layer w0.305: FB2.1@16.777,35.509 C65.2 C66.2 19.152,37.084 19.558,37.49 19.558,39.802 19.041,40.319 C2.2 17.721,43.125 v1(17.109,42.512)
VCC_RDO: C11.2 C12.2 C13.2 C14.2 C16.1 C17.1 C20.2 C21.2 C22.2 C25.2 C26.2 C31.1 C34.1 C35.1 U3.5 U4.1 U4.5 U4.12 U4.13 U4.15 U4.22 U4.25 U4.27 U4.28 X1.4 | length 65.9
  Top Layer w0.203: v1(17.285,61.252) 18.39,61.252 C11.2 ; C11.2@18.428,61.309 U3.5 ; X1.4 23.953,40.487 24.27,40.17 24.27,38.002 23.39,37.122 23.622,36.89 v1(23.622,35.941) ; v1(23.635,46.901) 25.324,46.901 C17.1 C16.1 28.034,46.812 ; v1(26.848,51.219) 26.937,51.13 26.848,51.041 C20.2 26.983,49.949 29.043,47.889 U4.25 ; v1(27.572,52.235) 28.53,53.193 C22.2 29.35,52.489 30.366,52.489 31.521,51.334 U4.22 ; U4.28 28.457,46.389 28.034,46.812 ; U4.27 28.284,46.889 28.207,46.812 28.034,46.812 ; C25.2 C25.2@30.239,38.303 ; U4.1 30.521,42.586 28.715,40.78 28.715,38.138 30.074,38.138 C25.2@30.239,38.303 ; v1(30.62,39.535) 30.239,39.154 C25.2@30.239,38.303 ; U4.5 32.521,41.444 C26.2 34.626,37.053 C13.2 34.614,36.926 v1(33.668,35.979) ; U4.12 35.569,45.889 36.335,45.123 C35.1 ; U4.13 36.74,46.389 36.871,46.52 C34.1 C35.1 ; U4.15 35.553,47.389 C31.1@37.776,49.613 ; v1(36.208,50.965) C12.2 C31.1 ; v1(38.24,43.599) 37.821,44.018 C35.1
VDD: C5.2 C8.2 C9.2 C41.2 C43.2 C51.2 C53.2 C54.2 C55.2 C57.2 C58.2 C59.2 C60.2 C61.2 C62.2 D3.2 FB1.1 P1.1 P2.4 R19.1 U1.5 U6.A22 U6.AD14 U6.AD23 U6.B1 U6.W1 U6.Y2 | length 57.2
  Top Layer w0.152: C8.2@20.422,49.822 C8.2 C9.2 20.422,52.794 FB1.1 ; U6.A22 23.373,13.976 22.448,13.051 C60.2 C41.2 24.468,12.186 24.48,12.198 25.357,12.198 C61.2 ; v1(24.607,24.771) 24.607,24.23 25.373,23.464 U6.AD14 ; U6.Y2 28.426,20.675 28.712,20.961 30.322,20.961 31.465,22.104 C54.2
  Top Layer w0.203: v1(6.096,33.909) 6.096,35.268 C5.2 ; v1(8.115,22.314) R19.1@8.115,23.825 ; U1.5@8.442,35.306 U1.5 ; v1(14.237,25.057) 15.622,25.057 C53.2@15.749,24.93 ; C53.2 C57.2 18.682,25.045 C59.2@18.809,24.918 ; C59.2 19.753,25.045 U6.AD23 ; C8.2@20.422,49.822 20.46,49.784 v1(20.46,48.425) ; v1(20.924,12.198) 22.436,12.198 C60.2 ; v1(24.607,27.553) 25.171,28.117 C62.2 C58.2 ; v1(27.826,26.835) C58.2 ; U6.B1 30.682,14.116 C43.2 31.678,13.361 v1(32.1,12.939) ; U6.W1 28.875,20.428 30.447,20.428 30.45,20.425 31.691,20.425 C51.2@31.719,20.453 ; C55.2 C58.2 ; v1(31.731,19.171) C51.2 ; C54.2 32.747,22.878 v1(33.364,23.495) ; D3.2 42.558,15.671 v1(42.558,14.008)
  Top Layer w0.406: C5.2 U1.5@8.442,35.306
  Bottom Layer w0.203: v1(24.607,24.771) v1(24.607,27.553)
pads on no net: CONN1.0 CONN1.4 J1.3 J1.4 P1.6 P1.7 U4.16 U4.31 U5.2 U5.3 U5.4 U6.A8 U6.A16 U6.A20 U6.AB2 U6.AC9 U6.AC11 U6.AC15 U6.AC17 U6.AC19 U6.AC21 U6.AD20 U6.B3 U6.B9 U6.B11 U6.B13 U6.B15 U6.B17 U6.B19 U6.G1 U6.H2 U6.J24 U6.K2 U6.L24 U6.M2 U6.P2 U6.P23 U6.R24 U6.T2 U6.T23 U6.V23 U6.Y23 X1.1 X1.5
copper on no net:
  other v4: 40.399,5.499 5.474,59.474

## Polygon pours and split planes (outlines as drawn)
GND on Bottom Layer "GND_L04_P040" (solid, remove dead copper, pour order 40): 21.59,20.955 21.59,2.667 2.667,2.667 2.667,20.955
GND on Bottom Layer "GND_L04_P024" (solid, remove dead copper, pour order 24): -82.283,-69.558
GND on Bottom Layer "GND_L04_P022" (solid, remove dead copper, pour order 22): -82.283,-69.558
GND on Bottom Layer "GND_L04_P010" (solid, remove dead copper, pour order 10): -82.283,-69.558
GND on Bottom Layer "GND_L04_P036" (solid, remove dead copper, pour order 36): 17.018,62.103 17.018,53.848 23.368,53.848 23.368,34.798 43.053,34.798 43.053,62.103
GND on Bottom Layer "GND_L04_P034" (solid, remove dead copper, pour order 34): 2.667,62.103 16.002,62.103 16.002,52.832 19.177,52.832 19.177,36.703 2.667,36.703
GND on Top Layer "GND_L01_P032" (solid, remove dead copper, pour order 32): 17.018,62.103 17.018,53.848 23.368,53.848 23.368,34.798 43.053,34.798 43.053,62.103
GND on Top Layer "GND_L01_P038" (solid, remove dead copper, pour order 38): 21.59,20.955 21.59,2.667 2.667,2.667 2.667,20.955
GND on Top Layer "GND_L01_P020" (solid, remove dead copper, pour order 20): -82.283,-69.558
GND on Top Layer "GND_L01_P012" (solid, remove dead copper, pour order 12): -82.283,-69.558
GND on Top Layer "GND_L01_P008" (solid, remove dead copper, pour order 8): -82.283,-69.558
GND on Top Layer "GND_L01_P030" (solid, remove dead copper, pour order 30): 2.667,62.103 16.002,62.103 16.002,52.832 19.177,52.832 19.177,36.703 2.667,36.703
GND on Internal Plane 1 (split plane): 43.305,2.415 2.415,2.415 2.415,62.355 43.305,62.355
VCC_RDO on Internal Plane 2 (split plane): 43.305,35.163 39.805,38.662 39.752,38.703 39.69,38.728 39.624,38.737 23.116,38.737 23.116,53.34 23.107,53.406 23.082,53.468 23.041,53.521 22.988,53.562 22.926,53.587 22.86,53.596 16.766,53.596 16.766,62.355 43.305,62.355
VDD on Internal Plane 2 (split plane): 22.604,38.481 22.613,38.415 22.638,38.353 22.679,38.3 22.732,38.259 22.794,38.234 22.86,38.225 39.518,38.225 43.305,34.438 43.305,2.415 2.415,2.415 2.415,35.939 19.685,35.939 19.751,35.948 19.813,35.973 19.866,36.014 19.907,36.067 19.932,36.129 19.941,36.195 19.941,53.084 22.604,53.084
VCC on Internal Plane 2 (split plane): 16.254,53.34 16.263,53.274 16.288,53.212 16.329,53.159 16.382,53.118 16.444,53.093 16.51,53.084 19.429,53.084 19.429,36.451 2.415,36.451 2.415,62.355 16.254,62.355

## Keep-outs
Keep-Out Layer:
  the board outline again, w0.254

## Other copper
Bottom Layer:
  pour cut-out: -31.483,57.442
  pour cut-out: -31.483,57.442
Internal Plane 1 (plane layer: these items are gaps in the copper):
  pour cut-out: 5.94,26.797 5.94,31.877 4.699,31.877 4.699,26.797
Internal Plane 2 (plane layer: these items are gaps in the copper):
  pour cut-out: 5.94,26.797 5.94,31.877 4.699,31.877 4.699,26.797
  lines w0.508: 1.905,36.195 19.685,36.195 19.685,53.34 ; 16.51,62.865 16.51,53.34 19.685,53.34 ; 43.815,34.29 39.624,38.481 22.86,38.481 22.86,53.34 19.685,53.34

## Silkscreen, mask and mechanical layers (free items; w line width, h text height)
Top Overlay:
  drawing of 818 lines, arcs and shapes, not listed
  text "Goverdhan & Anh" at 27.305,5.715 h1.52
  text "Sitara Rev.2" at 27.305,4.445 h1.52
  text "04/10/2017" at 27.305,3.175 h1.52
  text "AL" at 41.91,2.54 h1.02
Mechanical 3:
  the board outline again, w0.254
Mechanical 14:
  circle w0.953: c5.474,59.474 r1.435
  circle w0.953: c40.399,5.499 r1.435
  lines w1.016: 0,0 45.872,0 45.872,64.973 0,64.973 0,0

## Dimensions
1.905,1.905 to 43.815,1.905 on Mechanical 1
1.905,1.905 to 1.905,62.865 on Mechanical 1